# Altium PCB Led_Chaser2.PcbDoc
Units mil, origin at the board's own origin, x right, y up, seen from the top; angles counter-clockwise.
Board outline 1375.03 x 1030.03 mil, 2 copper layers (Top Layer, Bottom Layer); 23 components, 18 nets, 64 pads, 6 vias.
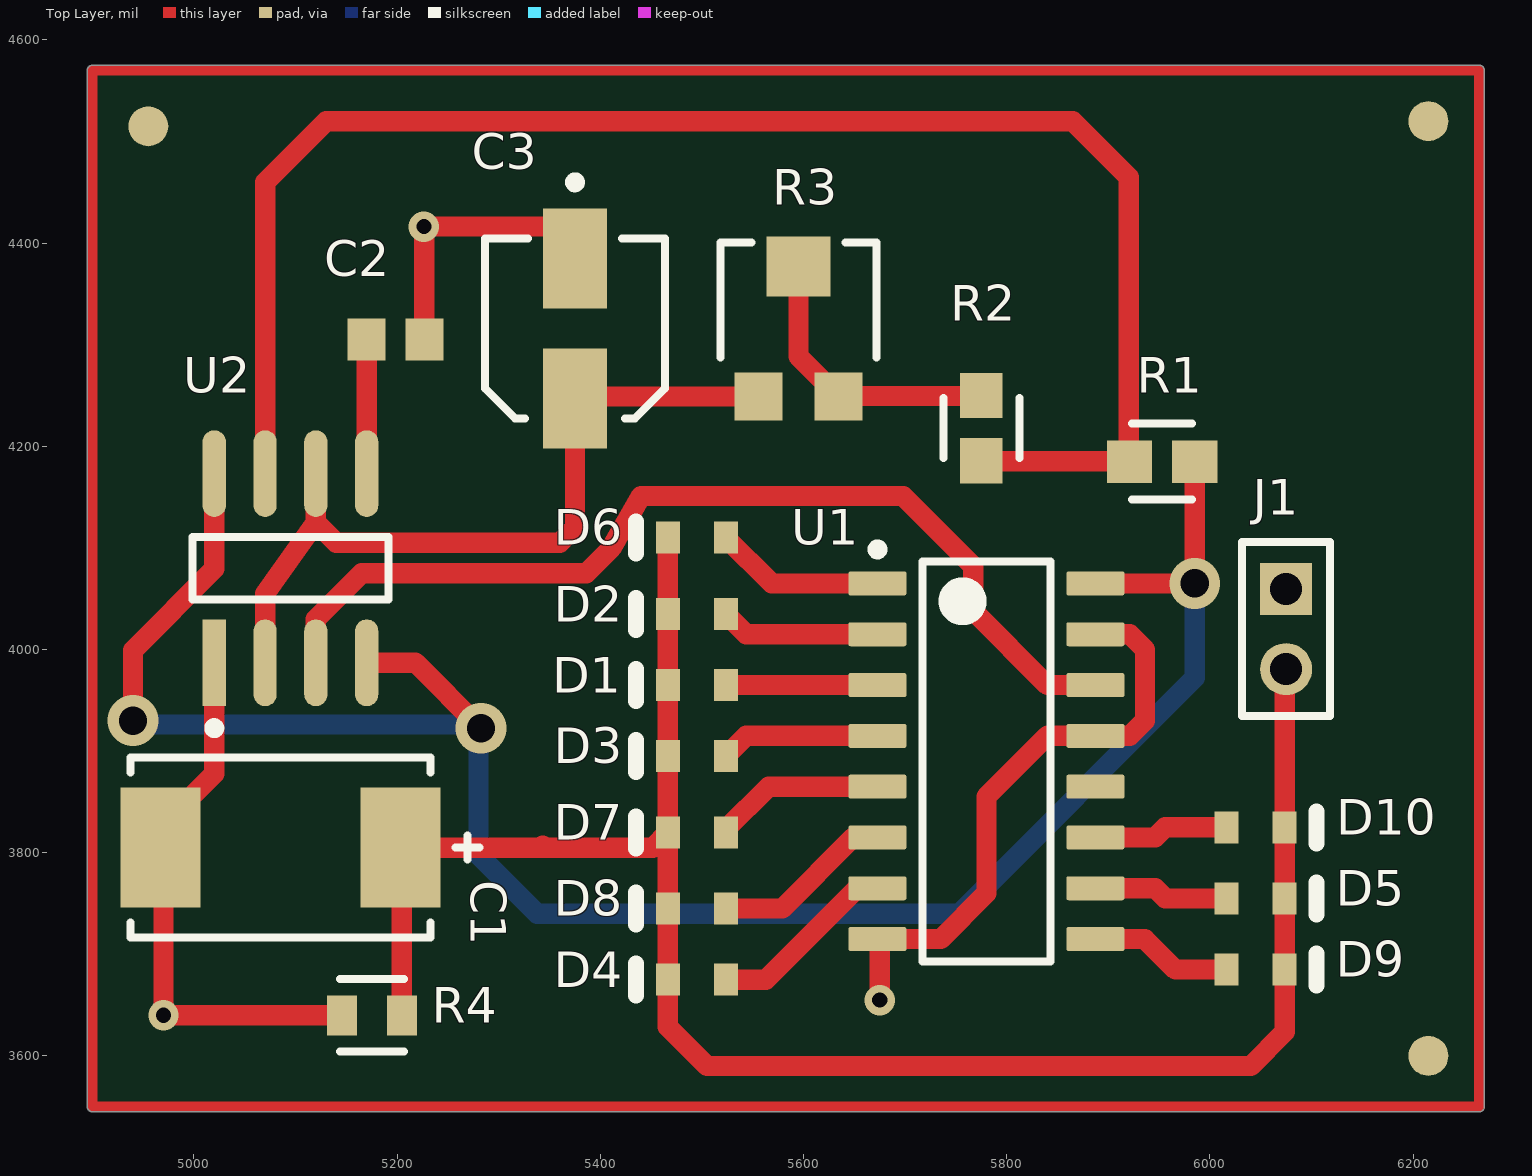
[diagram p0: Top Layer view]
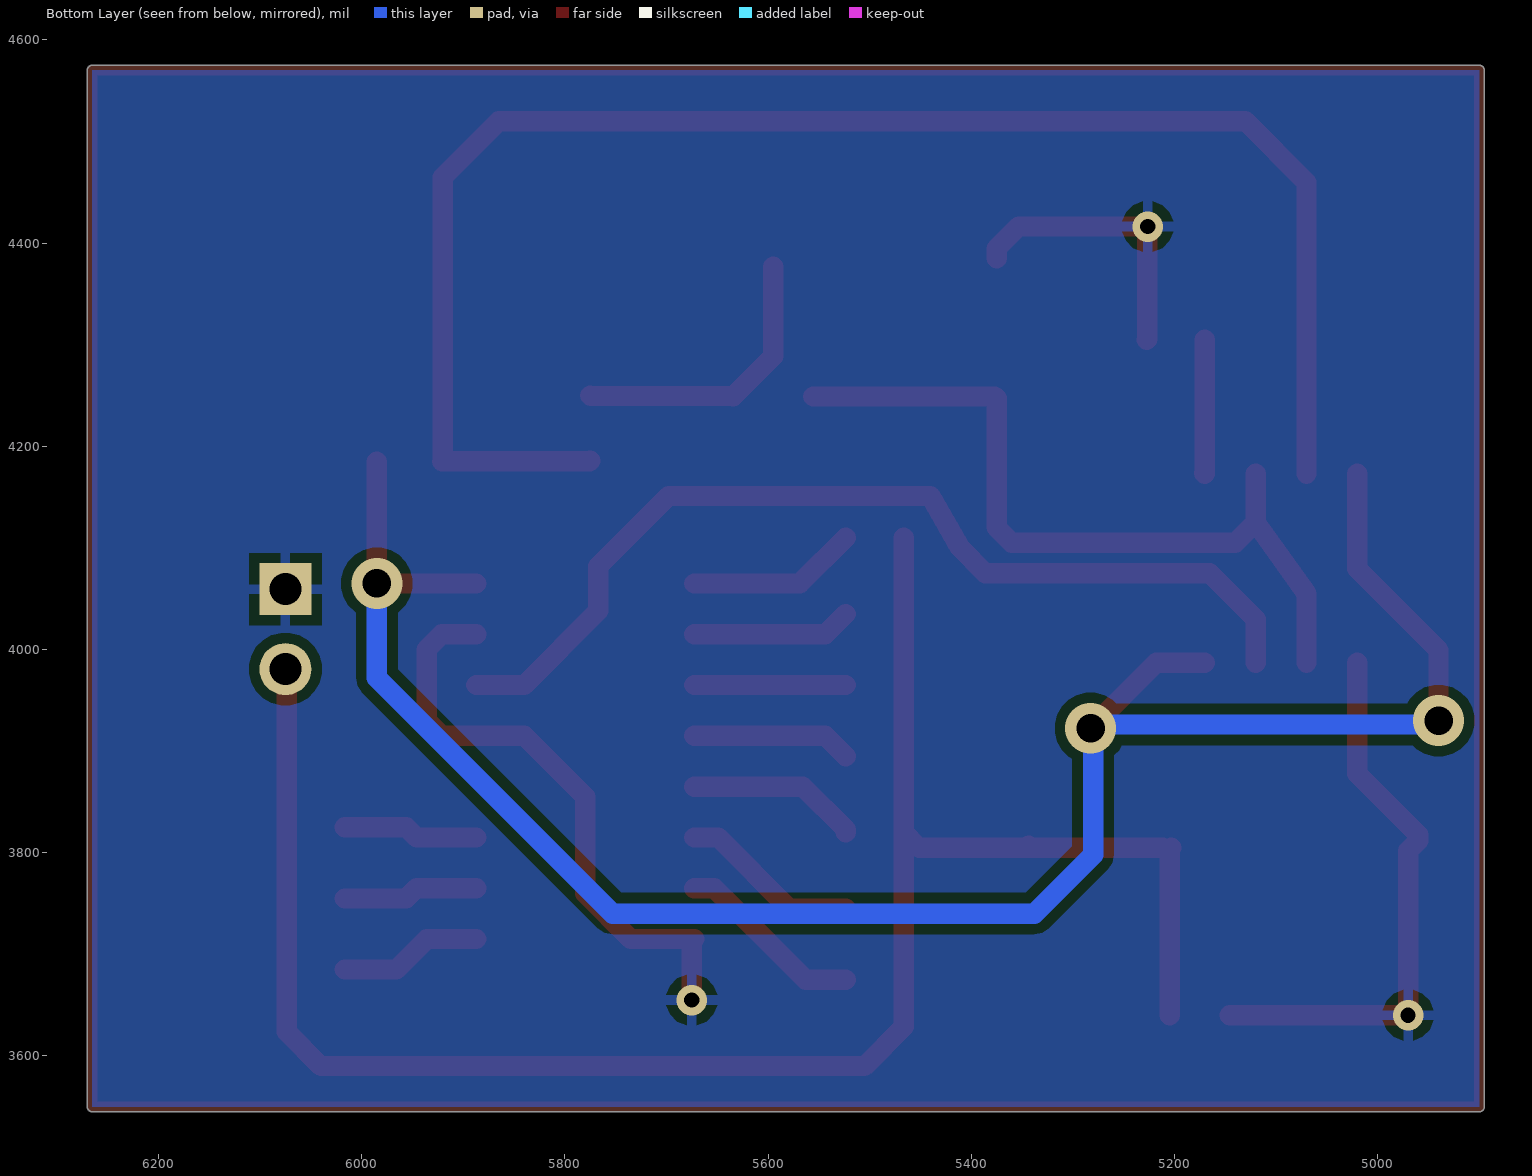
[diagram p1: Bottom Layer view, seen from below]
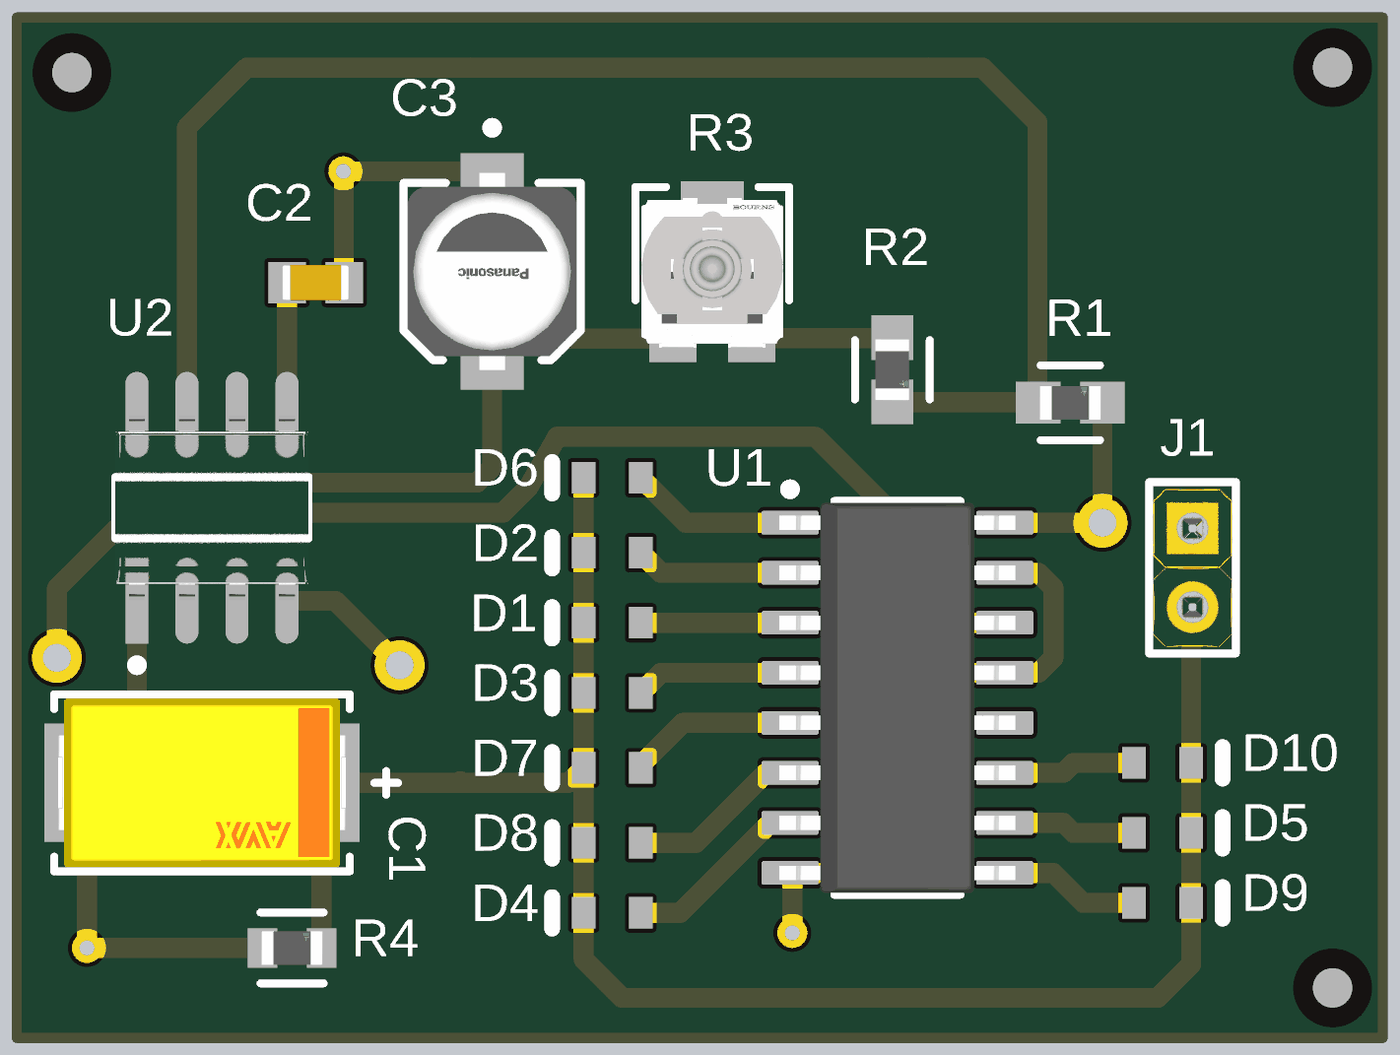
[diagram p2: 3D render of the assembled board from above, using the file's embedded part models]

## Layer stack, top to bottom
Top Solder: solder mask 0.4, Solder Resist, Dk 3.5
Top Layer: signal copper 1.4
Dielectric 1: dielectric 12.6, FR-4, Dk 4.8
Bottom Layer: signal copper 1.4
Bottom Solder: solder mask 0.4, Solder Resist, Dk 3.5

## Board outline
4894.98,3550 ccw(c4900,3550) 4900,3544.99 6265,3544.99 ccw(c6265,3550) 6270.02,3550 6270.02,4570 ccw(c6265,4570) 6265,4575.02 4900.03,4575.01 ccw(c4900,4570) 4894.98,4570

## Design rules (kind name [scope] priority, off if disabled: settings)
Clearance [All] p1: gap=10 ignorepadtopadclearanceinfootprint=FALSE except(0: Arc-Hole Track-Hole SMDPad-Hole THPad-Hole Via-Hole Fill-Hole Poly-Hole Region-Hole Text-Hole)
PolygonConnect [All] p1: connectstyle=Relief reliefconductorwidth=10 reliefentries=4 polygonreliefangle="90 Angle" airgapwidth=10
RoutingVias [All] p1: holewidth=28 width=50 viastyle="Through Hole" minholewidth=28 minwidth=50 maxholewidth=28 maxwidth=50
SilkToSolderMaskClearance [IsText] p1: minsilkscreentomaskgap=10 clearancetoexposedcopper=TRUE
SolderMaskExpansion [All] p1: expansion=4 istentingtop=FALSE
Width [All] p1: maxlimit=25 minlimit=10 preferedwidth=20 minimp=50.000000 maximp=50.000000 favimp=50.000000
29 further rules are at their usual default settings.

## Classes and differential pairs
component class Led_Chaser: C1 C2 C3 D1 D2 D3 D4 D5 D6 D7 D8 D9 D10 J1 R1 R2 R3 R4 U1 U2

## Components (designator, comment, footprint, x,y, rotation, side; value= is the part's Value field where it differs from the comment)
C1 "TAJD106K050RNJ" FP-TAJD-MFG 5085,3805 r0 top
C2 "GRM188R71H103KA01D" CAPC1608X90X35ML10T15 5198.54,4305 r180 top
C3 "EEE1HA010SR" FP-SB-MFG 5375,4316.1 r270 top
D1 "TLMY1000-GS08" VISH-TLMY1000_V 5495,3965 r180 top
D2 "TLMY1000-GS08" VISH-TLMY1000_V 5495,4035 r180 top
D3 "TLMY1000-GS08" VISH-TLMY1000_V 5495,3895 r180 top
D4 "TLMY1000-GS08" VISH-TLMY1000_V 5495,3675 r180 top
D5 "TLMY1000-GS08" VISH-TLMY1000_V 6045,3755 r0 top
D6 "TLMY1000-GS08" VISH-TLMY1000_V 5495,4110 r180 top
D7 "TLMY1000-GS08" VISH-TLMY1000_V 5495,3820 r180 top
D8 "TLMY1000-GS08" VISH-TLMY1000_V 5495,3745 r180 top
D9 "TLMY1000-GS08" VISH-TLMY1000_V 6045,3685 r0 top
D10 "TLMY1000-GS08" VISH-TLMY1000_V 6045,3825 r0 top
J1 "M22-2510205" FP-M22-2510205-MFG 6075,4020 r270 top
R1 "CRCW06031K50FKEA" FP-CRCW0603-e3-IPC_A 5952.9,4185 r0 top
R2 "CRCW06031K50FKEA" FP-CRCW0603-e3-IPC_A 5775,4217.9 r270 top
R3 "TC33X-2-104E" FP-TC33X-2-MFG 5595,4315 r0 top
R4 "CRCW0603330RFKEA" FP-CRCW0603-e3-MFG 5175,3640 r0 top
U1 "CD4017BM" D0016A_N 5780,3890 r0 top
U2 "TLC555CDR" FP-D0008A-IPC_B 5095,4080 r90 top
? "Comment" FIDUCIAL#1 6215,4520 r0 top
? "Comment" FIDUCIAL#2 6215,3600 r0 top
? "Comment" FIDUCIAL#1 4955,4515 r0 top

## Footprints (in the part's own frame and the unit in brackets; to place one, negate y for a bottom-side part, rotate by r counter-clockwise, add the part's x,y. Pads: shape width x height; smd on the part's side, far side on the other; paste and mask are expansions set on the pad)
CAPC1608X90X35ML10T15 [mm] "Chip Capacitor, 2-Leads, Body 1.7x0.9mm, IPC Low Density"
  rect 0.95x1.05 smd: 1(-0.725,0) 2(0.725,0)
  body extent -0.85,-0.45 0.85,0.45, height 0.9
D0016A_N [mm] "SOIC, 16-Leads, Body 10x4mm, Pitch 1.27mm, IPC Medium Density"
  rrect17% 1.45x0.6 smd: 1(-2.725,4.445) 2(-2.725,3.175) 3(-2.725,1.905) 4(-2.725,0.635) 5(-2.725,-0.635) 6(-2.725,-1.905) 7(-2.725,-3.175) 8(-2.725,-4.445) 9(2.725,-4.445) 10(2.725,-3.175) 11(2.725,-1.905) 12(2.725,-0.635) 13(2.725,0.635) 14(2.725,1.905) 15(2.725,3.175) 16(2.725,4.445)
  silkscreen extent -2.85,-5 1.6,5.42, body extent -3,-4.95 3,4.95, height 1.59
FIDUCIAL#1 [mm] "FIDUCIAL 1mm SOLDER MASK 2mm KEEP OUT 2mm"
  round 1 smd mask+0.5: 0(0,0)
FIDUCIAL#2 [mm] "FIDUCIAL 1mm SOLDER MASK 2mm KEEP OUT 2mm"
  round 1 smd mask+0.5: ""(0,0)
FP-CRCW0603-e3-IPC_A [mil]
  rect 44.69x41.82 smd paste+0 mask+0: 1(-32.1,0) 2(32.1,0)
  silkscreen extent -30,-37 30,37, body extent -74,-41 74,41, height 10
FP-CRCW0603-e3-MFG [mm]
  rect 0.75x1 smd paste+0 mask+0: 1(-0.75,0) 2(0.75,0)
  silkscreen extent -0.8,-0.9 0.8,0.9, body extent -1.22,-0.6 1.22,0.6, height 0.25
FP-D0008A-IPC_B [mil]
  rect 85.4x22.92 smd paste+0 mask+0: 1(-93.06,75)
  rrect100% 85.4x22.92 smd paste+0 mask+0: 2(-93.06,25) 3(-93.06,-25) 4(-93.06,-75) 5(93.06,-75) 6(93.06,-25) 7(93.06,25) 8(93.06,75)
  silkscreen extent -162,-97 31,97, body extent -146,-106 146,106, height 10
FP-M22-2510205-MFG [mm]
  rect 1.3x1.3 hole 0.8 paste-1000 mask+0: 1(-1,0)
  round 1.3 hole 0.8 paste-1000 mask+0: 2(1,0)
  silkscreen extent -2.18,-1.1 2.18,1.1, body extent -2.27,-1.2 2.27,1.2, height 0.25
FP-SB-MFG [mm]
  rect 2.5x1.6 smd paste+0 mask+0: 1(-1.75,0) 2(1.75,0)
  silkscreen extent -3.77,-2.25 2.25,2.25, body extent -3.25,-2.5 3.25,2.5, height 0.25
FP-TAJD-MFG [mm]
  rect 2x3 smd paste+0 mask+0: 1(-3,0) 2(3,0)
  silkscreen extent -3.75,-2.25 4.97,2.25, body extent -4.1,-2.35 4.1,2.35, height 0.25
FP-TC33X-2-MFG [mm]
  rect 1.2x1.2 smd paste+0 mask+0: 1(-1,-1.675) 3(1,-1.675)
  rect 1.6x1.5 smd paste+0 mask+0: 2(0,1.575)
  silkscreen extent -1.95,-0.7 1.95,2.18, body extent -2.05,-2.37 2.05,2.42, height 0.25
VISH-TLMY1000_V [mm] "SMD, 2-Leads, Body 1.6x0.8mm"
  rect 0.6x0.8 smd: 1(-0.725,0) 2(0.725,0)
  silkscreen extent 1.53,-0.4 1.53,0.4, body extent -0.8,-0.4 0.8,0.4, height 0.65

## Part data
C1: library part CMP-2000-05063-2, "10uF 50V  ±10% 800mΩ 2917  SMD Tantalum Capacitor", Capacitance=10uF, Case Code (Imperial)=2917, Case Code (Metric)=7343, Dielectric Material=Tantalum, ESR (Equivalent Series Resistance)=800mR, Leakage Current=5uA, Max Operating Temperature=125°C, Min Operating Temperature=-55°C, Package Quantity=1, Tolerance=10%, Voltage=50V, Case/Package=2917, Construction=Flat, Depth=4.3mm, Dissipation Factor=6%, Features="General Purpose", Height=2.9mm, Height - Seated (Max)=0.122inch, Lead Free="Lead Free", Length=7.3mm, Mount="Surface Mount", Number of Pins=2, Packaging="Tape and Reel", Polarity=Polar, Radiation Hardening=No, REACH SVHC="No SVHC", RoHS Compliant=Yes, Series=TAJ, Termination=SMD/SMT, Voltage Rating=50V, Voltage Rating (DC)=50V, Width=0.169inch
C2: library part CMP-2100-03642-1, "Chip Capacitor, 10 nF, +/- 10%, 50 V, -55 to 125 degC, 0603 (1608 Metric), RoHS, Tape and Reel", Capacitance=10nF, Case Code (Imperial)=0603, Case Code (Metric)=1608, Dielectric=X7R, Dielectric Material=Ceramic, Insulation Resistance=10GR, Manufacturer=Murata, Max Operating Temperature=125degC, Min Operating Temperature=-55degC, Package Description="2-Pin Surface Mount Device, Body 1.6 x 0.8 mm", Package Quantity=1, Tolerance=10%, Voltage=50V, Case/Package=0603, Datasheet URL=http://search.murata.co.jp/Ceramy/image/img/A01X/G101/ENG/GRM188R71H103KA01-01.pdf, Datasheet Version=42401.0, Depth=0.8mm, Height=0.8mm, Lead Free=LeadFree, Length=1.6mm, Manufacturer URL=http://www.murata.com/, Material=Ceramic, Mount=SurfaceMount, Number of Pins=2, Package Reference=0603, Packaging=TapeandReel, REACH SVHC=Unknown, RoHSCompliant=True, Termination=SMD/SMT, Thickness=0.035inch, Voltage Rating=50V, Voltage Rating (DC)=50V, Width=0.031inch
C3: library part CMP-05427-000070-1, "CAP ALUM 1UF 20% 50V SMD", Capacitance=1uF, Case/Package=Radial, Dielectric Material=Aluminium, Leakage Current=3uA, Max Operating Temperature=85°C, Min Operating Temperature=-40°C, Package Quantity=2000, Ripple Current=10mA, Tolerance=20%, Voltage=50V, Construction=Cylindrical, Contact Plating=Tin, Diameter=4mm, Height=5.4mm, Height - Seated (Max)=0.213inch, Lead Free="Lead Free", Lead Length=1.8mm, Lead Pitch=1mm, Length=5.5mm, Life (Hours)=2000Hour, Mount="Surface Mount", Number of Pins=2, Packaging="Tape and Reel", Polarity=Polar, Radiation Hardening=No, REACH SVHC="No SVHC", Ripple Current (AC)=10mA, RoHS Compliant=Yes, Series=S, Termination=SMD/SMT, Voltage Rating=50V, Voltage Rating (DC)=50V, Width=4.3mm
D1 D2 D3 D4 D5 D6 D7 D8 D9 D10: library part CMP-2000-07255-1, "Low Current LED, 40 mW, -40 to 100 degC, 2-Pin SMD, RoHS, Tape and Reel", Forward Current If=2mA, Forward Voltage=1.8V, LED Colour=Yellow, Manufacturer=Vishay, Package Description="2-Pin Surface Mount Device, Body 1.6 x 0.8 mm", Package Reference=TLMY1000, Automotive Qualification Standard=AEC-Q100, Bulb Size=1.6mmx0.8mm, Datasheet URL=http://www.vishay.com/docs/83172/tlmo1000.pdf, Datasheet Version="Rev. 2.0, 09/2013", LED Mounting=SMD, Lens Shape=Rectangular, Luminous Intensity=7.5mcd, Manufacturer URL=http://www.vishay.com/, Mounting Technology=SurfaceMount, MSL=MSL2-1year, Packaging=CutTape, Product Range=-, SVHC=ToBeAdvised, Viewing Angle=80°, Wavelength Typ=595nm
J1: library part CMP-15831-000005-1, "CONN HEADER VERT 2POS 2MM", Current Rating=2A, Manufacturer=Harwin, Package=0, Temperature="-40°C to +105°C", Temperature Range High=+105°C, Temperature Range Low=-40°C, Automotive=No, Category=Conn, ComponentLink2Description=Datasheet, ComponentLink2URL=https://cdn.harwin.com/pdfs/C018XX_M22_Series_Connectors.pdf, Conn Gender=Male, Conn Orientation=Vertical, Contact Material=Gold,Nickel, Device Class L1=Connectors, Device Class L2="Headers and Wire Housings", Device Class L3=unset, Digikey Description="CONN HEADER VERT 2POS 2MM", Footprint Url=https://cdn.harwin.com/pdfs/M22-251.pdf, Height=5.45mm, Lead Free=Yes, Manufacturer Part Number=M22-2510205, Mouser Description="Headers & Wire Housings 2 PIN SIL VERTICAL GOLD PIN HEADER", Number Of Contacts=2, Number Of Rows=1, Octopart=https://octopart.com/m22-2510205-harwin-2538221, Pitch=2mm, RoHS=TRUE
R1 R2: library part CMP-2000-02995-2, "RES Thick Film, 1.5kΩ, 1%, 0.1W, 100ppm/°C, 0603", Case Code (Imperial)=0603, Case Code (Metric)=1608, Max Operating Temperature=155°C, Max Power Dissipation=100mW, Min Operating Temperature=-55°C, Package Quantity=10, Resistance=1.5kR, Temperature Coefficient=100ppm/°C, Tolerance=1%, Voltage Rating=75V, Case/Package=0603, Composition="Thick Film", Contact Plating=Tin, Depth=0.85mm, Features="Automotive AEC-Q200", Height=0.45mm, Lead Free="Lead Free", Length=1.55mm, Military Standard=Not, Mount="Surface Mount", Number of Terminations=2, Packaging="Tape and Reel", Power Rating=100mW, Termination=SMD/SMT, Voltage Rating (DC)=75V, Weight=7.1E-05oz, Width=0.033inch, Working Voltage=75V
R3: library part CMP-07234-000040-1, "TRIMMER 100K OHM 0.1W J LEAD TOP", Color=Silver, Max Operating Temperature=100°C, Max Power Dissipation=100mW, Min Operating Temperature=-40°C, Package Quantity=2500, Resistance=100kR, Resistance Tolerance=25%, Resistor Type=Carbon, Temperature Coefficient=250ppm/°C, Voltage Rating (DC)=50V, Depth=3.8mm, Height=0.047inch, Length=3mm, Military Standard=Not, Mount="Surface Mount", Number of Turns=1, Packaging="Tape and Reel", Power Rating=100mW, Radiation Hardening=No, REACH SVHC="No SVHC", RoHS Compliant=Yes, Series=TC33, Termination="Foot Print", Tolerance=25%, Weight=29.4mg, Width=0.118inch
R4: library part CMP-1012-00454-3, "RES Thick Film, 330Ω, 1%, 0.1W, 100ppm/°C, 0603", Case Code (Imperial)=0603, Case Code (Metric)=1608, Max Operating Temperature=155°C, Max Power Dissipation=100mW, Min Operating Temperature=-55°C, Package Quantity=10, Resistance=330R, Temperature Coefficient=100ppm/°C, Tolerance=1%, Voltage Rating=75V, Case/Package=0603, Composition="Thick Film", Contact Plating=Tin, Depth=0.85mm, Features="Automotive AEC-Q200", Height=0.45mm, Lead Free="Lead Free", Length=1.55mm, Military Standard=Not, Mount="Surface Mount", Number of Terminations=2, Packaging="Tape and Reel", Power Rating=100mW, Radiation Hardening=No, Termination=SMD/SMT, Voltage Rating (DC)=75V, Weight=7.1E-05oz, Width=0.033inch
U1: library part CMP-1623-00071-2, "CMOS Decade Counter with 10 Decoded Outputs, D0016A, TUBE", F @ Nom Voltage(Max)(Mhz)=8, Generic Part Number=CD4017B, ICC @ Nom Voltage(Max)(mA)=0.03, Manufacturer="Texas Instruments", Operating Temperature Range(C)="-55 to 125", Rating=Military, tpd @ Nom Voltage(Max)(ns)=270, Voltage(Nom)(V)=10, Bits(#)=10, Code_JEDEC="MS-012 variation AC", DatasheetVersion=SCHS027C, Function=Counter, Input Type=CMOS, Inputs=1, Output Drive (IOL/IOH)(Max)(mA)=1.5/-1.5, Output Type=CMOS, PackageReference=D0016A, Schmitt Trigger=No, Technology Family=CD4000, Type=Decade, VCC(Max)(V)=18, VCC(Min)(V)=3
U2: library part CMP-04857-000001-1, "IC OSC SGL TIMER 2.1MHZ 8-SOIC", Case/Package=SOIC, Current Rating=250A, Frequency=2.1MHz, High Level Output Current=-10mA, Low Level Output Current=100mA, Max Operating Temperature=125°C, Max Power Dissipation=725mW, Max Supply Voltage=15V, Min Operating Temperature=-40°C, Min Supply Voltage=2V, Operating Supply Current=360uA, Package Quantity=2500, Quiescent Current=250uA, Height=1.58mm, Lead Free="Lead Free", Length=4.9mm, Mount="Surface Mount", Number of Channels=1, Number of Pins=8, Number of Timers/Counters=1, Packaging="Tape and Reel", Power Dissipation=725mW, Radiation Hardening=No, REACH SVHC="No SVHC", Termination=SMD/SMT, Weight=0.002561oz, Width=3.91mm

## Via types
v1: diameter 30, hole 15, Top Layer to Bottom Layer, 3 vias
v2: diameter 50, hole 28, Top Layer to Bottom Layer, 3 vias

## Nets (pads, with @x,y where several pads share a name; then routed paths per layer and width w, separated by ;. In a path a pad name is that pad's centre, name@x,y a point inside that pad or via, vN(x,y) a via of type N, cw(c..) or ccw(c..) an arc to the next point about the centre after c; other vN are vias at no path point)
GND: C1.1 C2.1 C3.1 J1.1 R4.1 U1.8 U1.13 U1.15 U2.1 | length 1424
  Top Layer w20: U2.1 5020,3877.8 4960,3817.8 4960,3811.89 C1.1 4970,3801.89 v1(4970,3640) R4.1 ; C2.1 5226.69,4305.39 5226.69,4415.87 v1(5226.3,4416.26) 5353.5,4416.26 5375,4394.76 C3.1 ; U1.8 U1.8@5673.19,3715 ; v1(5675,3655) 5675,3713.19 U1.8@5673.19,3715 ; U1.15 5921,4015 5936,4000 5936,3930 5921,3915 U1.13 5840,3915 5780,3855 5780,3760 5735,3715 U1.8@5673.19,3715
NetC1_2: C1.2 D1.2 D2.2 D3.2 D4.2 D5.2 D6.2 D7.2 D8.2 D9.2 D10.2 J1.2 R4.2 | length 1904.9
  Top Layer w20: C1.2 5204.53,3803.58 R4.2 ; C1.2@5211.22,3805 5343.23,3805 ; 5343.23,3806.77 5343.23,3805 ; D6.2 D2.2 D1.2 D3.2 D7.2 ; J1.2 6073.54,3979.17 D10.2 D5.2 D9.2 6073.54,3623.54 6040,3590 5505,3590 5466.46,3628.54 D4.2 D8.2 D7.2 ; 5343.23,3805 5451.46,3805 D7.2
NetC2_2: C2.2 U2.5 | length 132.7
  Top Layer w20: C2.2 U2.5 U2.5@5170.56,4173.61
NetC3_2: C3.2 R3.1 U2.2 U2.6 | length 780.2
  Top Layer w20: U2.2 5070,4055 5120,4125.08 ; U2.6 5120,4125.08 ; R3.1 5376.85,4249.06 C3.2 5375,4120 5360.08,4105.08 5140,4105.08 5120,4125.08
NetD1_1: D1.1 U1.3 | length 149.2
  Top Layer w20: D1.1 U1.3
NetD2_1: D2.1 U1.2 | length 157.5
  Top Layer w20: D2.1 5543.54,4015 U1.2
NetD3_1: D3.1 U1.4 | length 157.5
  Top Layer w20: D3.1 5543.54,3915 U1.4
NetD4_1: D4.1 U1.7 | length 186.5
  Top Layer w20: D4.1 5563,3675 5653,3765 U1.7
NetD5_1: D5.1 U1.10 | length 133.3
  Top Layer w20: U1.10 5946,3765 5956,3755 D5.1
NetD6_1: D6.1 U1.1 | length 167.8
  Top Layer w20: D6.1 5568.54,4065 U1.1
NetD7_1: D7.1 U1.5 | length 169.5
  Top Layer w20: D7.1 5523.54,3822.91 5565.64,3865 U1.5
NetD8_1: D8.1 U1.6 | length 178.2
  Top Layer w20: D8.1 5579,3745 5649,3815 U1.6
NetD9_1: D9.1 U1.9 | length 141.6
  Top Layer w20: U1.9 5936,3715 5966,3685 D9.1
NetD10_1: D10.1 U1.11 | length 133.3
  Top Layer w20: U1.11 5946,3815 5956,3825 D10.1
NetR1_1: R1.1 R2.2 U2.7 | length 1611
  Top Layer w20: U2.7 5070,4460 5130,4520 5865,4520 5920,4465 5920,4185.8 R1.1 5920.4,4185.4 5775.4,4185.4 R2.2
NetR1_2: R1.2 U1.16 U2.4 U2.8 | length 2022.4
  Top Layer w20: v2(4940,3930) 4940,3999.29 5020,4079.29 U2.8 ; U2.4 5218.06,3986.94 v2(5282.5,3922.5) ; U1.16 v2(5985,4065) R1.2
  Bottom Layer w20: v2(4940,3930) 4943.75,3926.25 5278.75,3926.25 v2(5282.5,3922.5) 5280,3920 5280,3798 5338,3740 5753,3740 5985,3972 v2(5985,4065)
NetR2_1: R2.1 R3.2 R3.3 | length 285.3
  Top Layer w20: R3.2 5595,4288.43 R3.3 5634.84,4249.53 5774.53,4249.53 R2.1
NetU1_14: U1.14 U2.3 | length 971.8
  Top Layer w20: U2.3 5120,4030 5165.08,4075.08 5386.08,4075.08 5411,4100 5440,4151 5698,4151 5767,4082 5767,4038 5840,3965 U1.14
pads on no net: ?. ?.0 U1.12
copper on no net: | length 4770
  Top Layer w10: 4900,3550 4900,4570 6265,4570 6265,3550 4900,3550

## Polygon pours and split planes (outlines as drawn)
GND on Bottom Layer "GND_L02_P000" (solid, pour order 0): 4900,4570 6265,4570 6265,3550 4900,3550